# Altium PCB PCB1.PcbDoc (part 3 of 4)
Units mm, origin at the board's own origin, x right, y up, seen from the top; angles counter-clockwise.
Board outline 49 x 49 mm, 8 copper layers (L1(SIG), L2(GND), L3(SIG), L4(GND), L5(PWR), L6(PWR), L7(GND), L8(SIG)), stack 1.6 mm thick; 175 components, 123 nets, 646 pads, 355 vias.
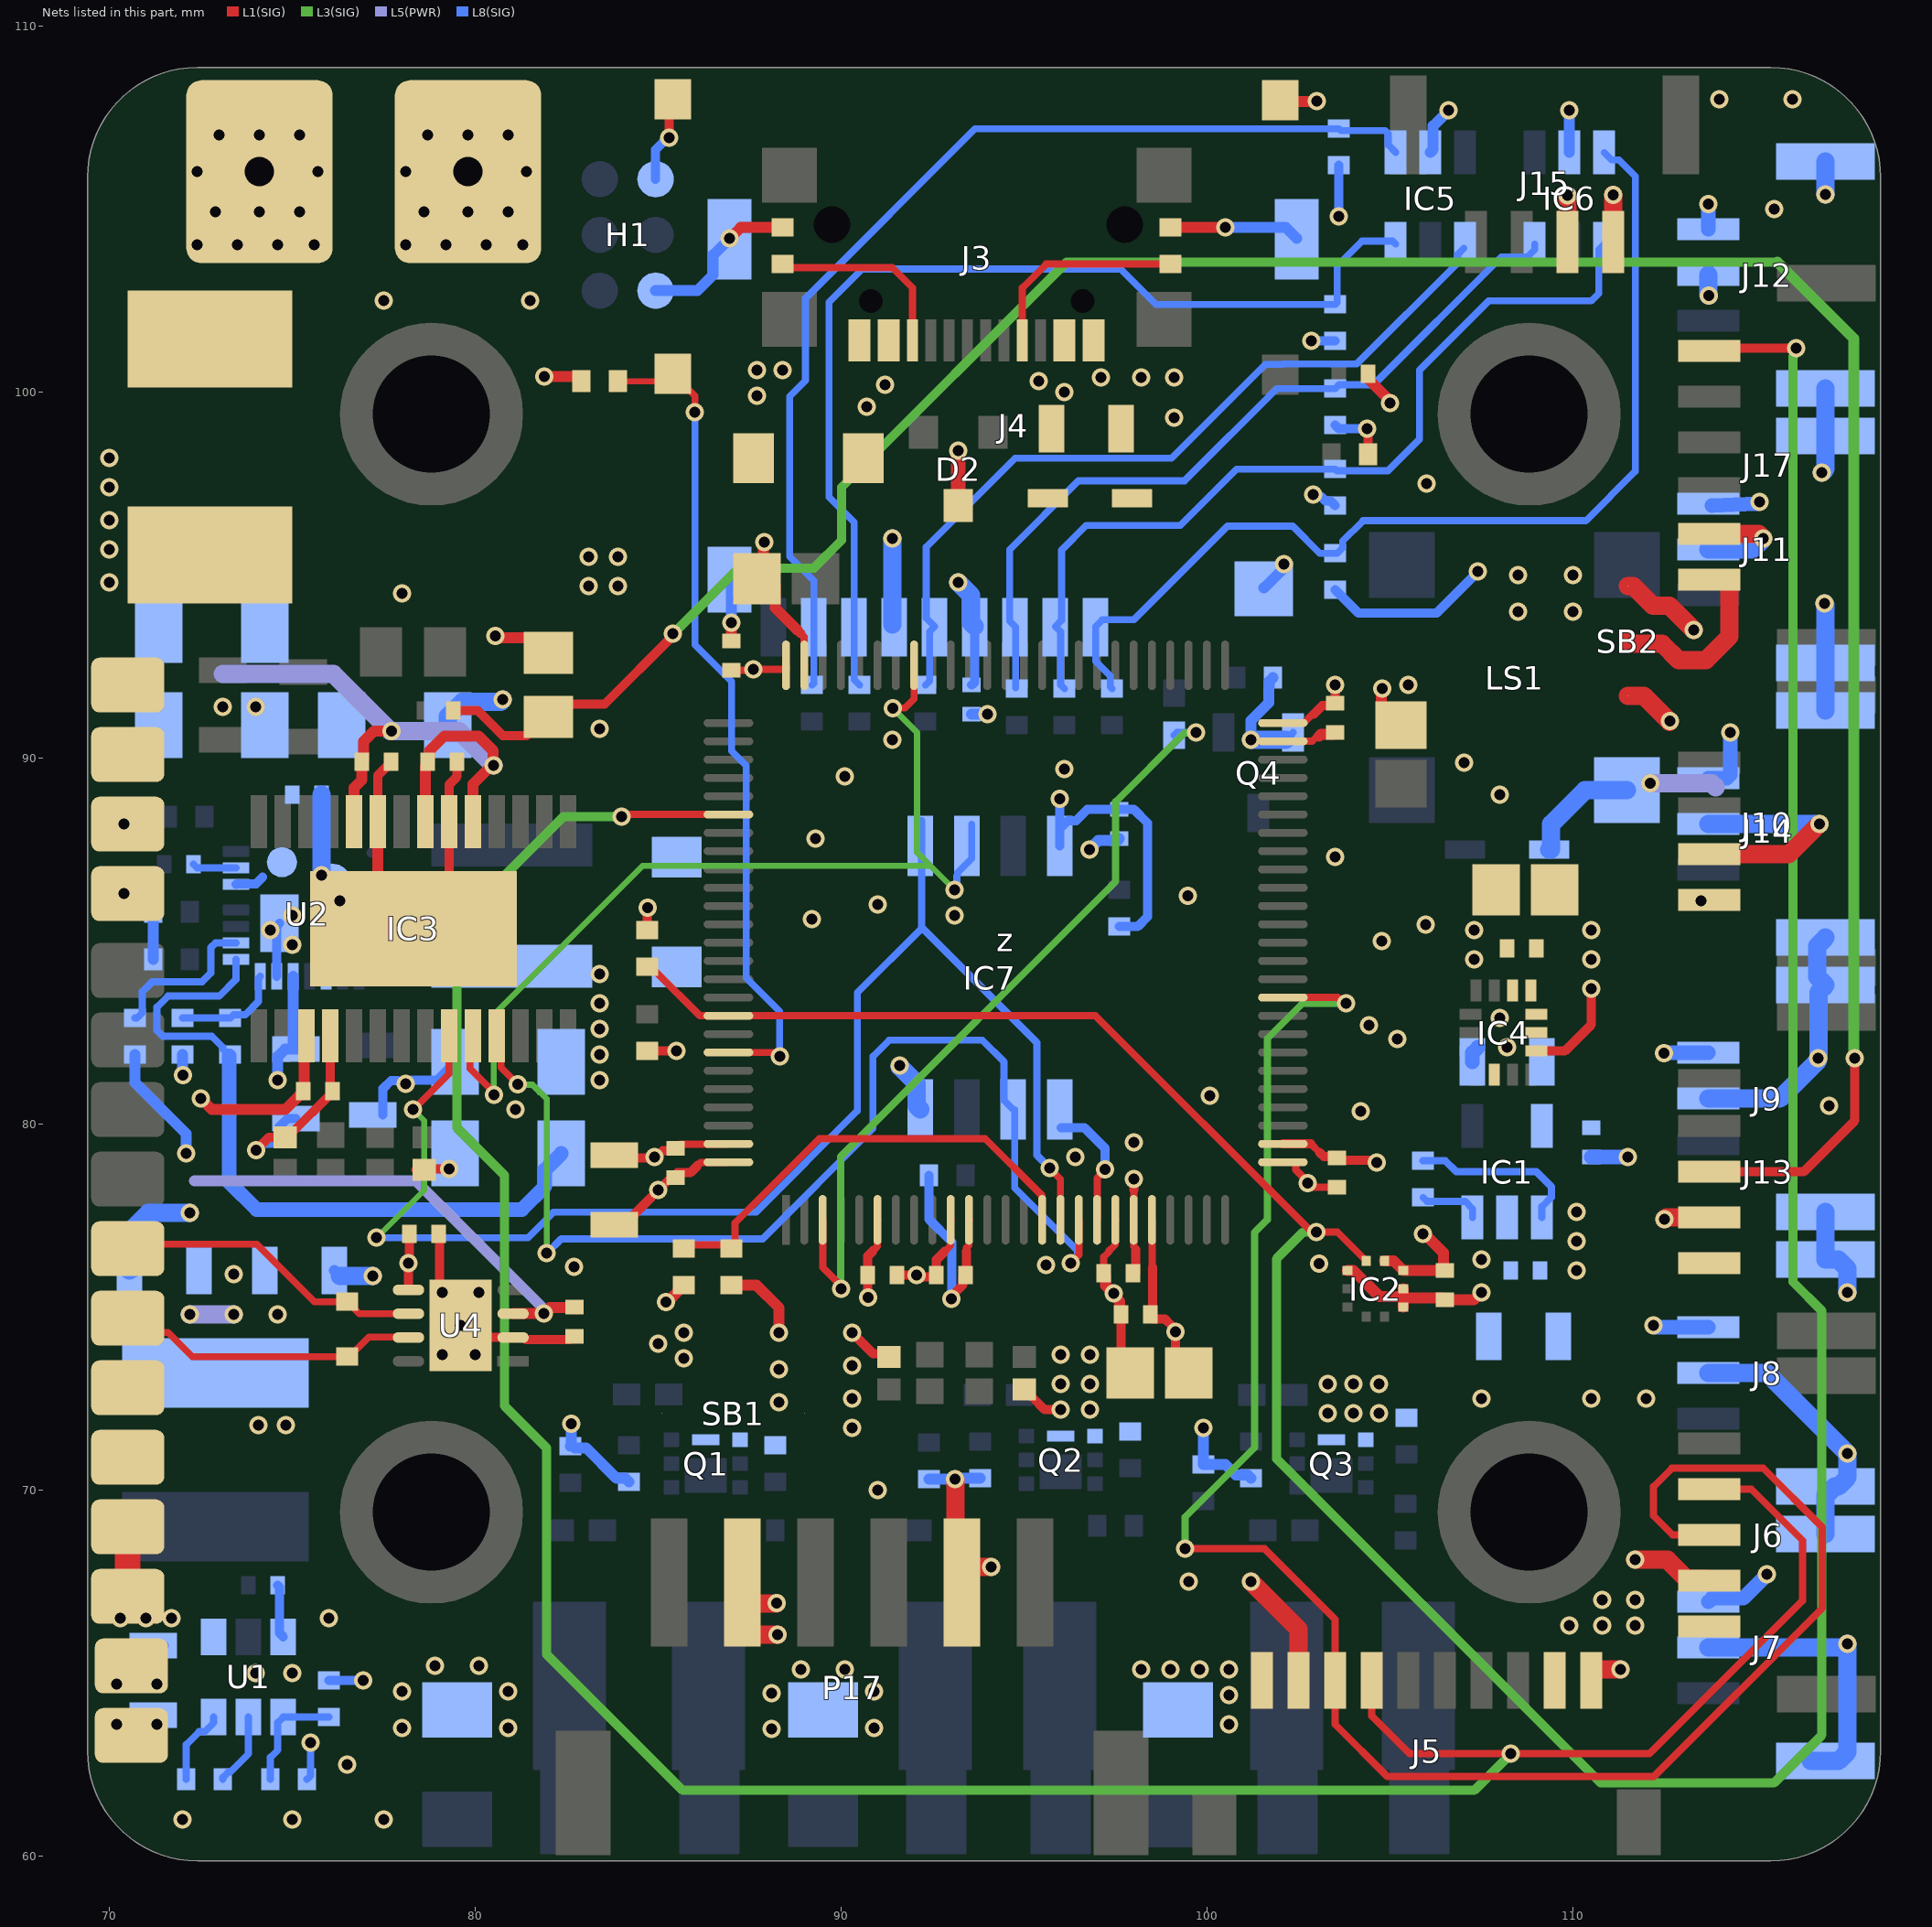
[diagram p8: the nets of this part, all layers, seen from the top]

## Via types
v1: diameter 0.5, hole 0.3, L1(SIG) to L8(SIG), tented both sides, 353 vias
v2: diameter 0.5, hole 0.3, L1(SIG) to L8(SIG), 2 vias

## Nets (pads, with @x,y where several pads share a name; then routed paths per layer and width w, separated by ;. In a path a pad name is that pad's centre, name@x,y a point inside that pad or via, vN(x,y) a via of type N, cw(c..) or ccw(c..) an arc to the next point about the centre after c; other vN are vias at no path point) (continued)
FLASH_CS: (continued)
  L1(SIG) w0.2: z.18@96.99,77.389 96.99,78.528 97.211,78.749 v1(97.211,78.763)
  L8(SIG) w0.25: IC7.1@96.005,79.9 96.649,79.9 97.211,79.338 v1(97.211,78.763)
GND: C1.1 C2.1 C3.1 C4.1 C5.1 C6.1 C7.1 C8.1 C9.1 C10.1 C11.1 C12.1 C13.1 C14.1 C16.1 C17.1 C18.1 C19.1 C20.1 C21.1 C23.1 C24.1 C25.1 C26.2 C27.1 C28.1 C29.1 C30.1 C31.1 C32.1 C33.1 C34.1 C35.1 C36.1 C40.1 C41.1 C42.2 C43.1 C44.1 C45.2 C46.2 C47.2 C48.1 C49.2 D1.2 D2.3 H1.3 IC1.2 IC2.3 IC2.8 IC2.9 IC3.4 IC3.20 IC3.23 IC3.29 IC4.2 IC4.6 IC4.7 IC4.9 IC5.5 IC6.5 IC7.4 J2.1 J3.A1 J3.B1 J4.6 J4.9 J4.10 J4.11 J4.12 J5.2 J5.10 J6.2 J7.2 J7.4 J7.5 J8.2 J8.4 J8.5 J9.2 J9.4 J9.5 J10.2 J10.4 J10.5 J11.2 J11.4 J11.5 J12.2 J12.4 J12.5 J13.2 J14.2 J15.2 J17.2 P1.1 P7.1 P13.1 P15.1 P17.2 P17.5 Q1.4 Q1.8 Q2.4 Q2.8 Q3.4 Q3.8 Q4.2 R4.2 R8.2 R12.1 R13.2 R14.1 R15.1 R16.1 R17.1 R18.1 R20.1 R21.1 R29.1 R37.1 R38.1 R39.1 R41.1 R42.1 R43.1 R45.1 S2.2 U1.4 U2.3-4-27 U2.13 U2.16 U2.25 U4.2 U4.9 z.10 z.19 z.26 z.49 z.74 z.99 | length 162.7
  L1(SIG) w0.2: C12.1@85.606,79.462 86.912,79.462 z.99@86.915,79.464 ; 88.9,93.4 88.988,93.312 88.988,92.542 z.74@88.99,92.539 ; 92.825,76.525 92.988,76.688 92.988,77.386 z.10@92.99,77.389 ; C14.1@97.175,75.925 97.175,76.375 97.325,76.525 97.325,76.55 97.488,76.713 97.488,77.386 z.19@97.49,77.389 ; v1@101.225,90.475 101.236,90.464 z.49@102.065,90.464 102.864,90.464 103,90.6 103.061,90.6 ; z.26@102.065,78.964 102.416,78.964 102.422,78.958 102.422,78.753 102.9,78.275 C7.1@103.55,78.275
  L1(SIG) w0.25: v1(74.003,79.29) 74.362,79.649 C46.2@74.8,79.649 ; C46.2@74.8,79.64 74.975,79.815 75.036,79.815 75.996,80.775 76.025,80.775 76.1,80.85 C35.1@76.1,80.879 ; IC3.4@76.026,82.421 76.026,80.974 C35.1@76.1,80.9 ; IC3.23@77.326,88.271 77.326,89.526 77.575,89.775 77.625,89.775 77.7,89.85 C40.1@77.7,89.9 ; IC3.29@78.301,85.346 79.276,86.321 IC3.20@79.276,88.271 79.276,89.276 79.5,89.5 C41.1@79.5,89.9 ; C47.2@78.373,78.757 78.597,78.757 C47.2@78.6,78.76 ; C47.2@78.74,78.6 78.74,78.719 78.795,78.774 v1(79.28,78.774) ; C45.2@79,77 79.017,76.983 79.017,75.483 v1(79.1,75.4) ; v1(79.6,74.5) 79.925,74.175 81.321,74.175 81.377,74.12 82.575,74.12 82.655,74.199 C42.2@82.705,74.199 ; C19.1@83.8,79.15 83.864,79.086 v1@84.886,79.086 ; v1(84.9,79.1) 84.946,79.1 85.124,79.279 85.4,79.279 C12.1@85.469,79.348 ; 88.8,93.5 88.9,93.4 ; v1(90.3,74.3) 90.865,73.735 91.205,73.735 C32.1@91.3,73.64 ; C1.1@91.525,75.875 91.531,75.881 v1(92.062,75.881) 92.109,75.835 92.56,75.835 C3.1@92.6,75.875 92.6,76.3 92.825,76.525 ; C33.1@95,72.76 95.02,72.76 95.195,72.585 95.195,72.565 95.56,72.2 v1(96,72.2) ; C28.1@97.65,73.75 C13.1@97.65,74.8
  L1(SIG) w0.3: IC3.23@77.326,88.271 77.326,86.321 IC3.29@78.301,85.346 ; v1(80.543,93.345) 80.597,93.345 80.643,93.299 81.576,93.299 R29.1@82,92.875 ; v1(81.878,100.432) 82.8,100.432 82.9,100.332 R4.2@82.9,100.3 ; v1(85.205,75.144) 85.244,75.144 85.55,75.45 85.55,75.5 85.65,75.6 R21.1@85.7,75.6 ; v1(86.95,104.2) 87.25,104.5 R16.1@88.4,104.5 ; C9.1@87,93.2 v1(87,93.7) ; C27.1@87.2,94.35 87.7,94.85 C27.1@87.7,94.9 87.866,95.066 87.866,95.866 v1(87.9,95.9) ; C27.1@88,94.9 88.199,94.701 88.199,94.101 88.8,93.5 ; C14.1@97.175,75.925 97.225,75.875 97.225,75.589 97.439,75.375 v1(97.45,75.375) 97.45,75.323 97.612,75.161 97.612,74.838 C13.1@97.65,74.8 ; R15.1@99,104.5 v1(100.5,104.5) ; S2.2@102,108 102.061,107.939 v1@102.989,107.939 ; 103.061,90.6 103.111,90.65 103.45,90.65 C11.1@103.5,90.7 ; IC2.3@103.838,76 104,76 104.709,75.291 105.321,75.291 105.362,75.25 ; C31.1@104.4,100.5 104.45,100.45 104.45,100.314 104.962,99.802 104.962,99.738 v1(105,99.7) ; v1(104.784,91.906) 104.762,91.884 104.762,91.4 105.262,90.9 C26.2@105.3,90.9 ; IC2.8@105.362,75 105.362,75.25 ; IC2.9@105.362,75.5 105.362,75.25 ; v1(107.5,75.4) 107.486,75.4 107.286,75.2 C36.1@106.5,75.2 106.45,75.25 105.362,75.25
  L1(SIG) w0.4: D2.3@93.2,96.9 v1(93.2,98.4)
  L1(SIG) w0.5: P17.2@87.3,67.475 P17.2@87.3,67.15 ; v1(88.228,66.914) 88.216,66.902 87.548,66.902 P17.2@87.3,67.15 ; v1(88.257,66.061) 87.55,66.061 87.3,66.311 P17.2@87.3,67.15 ; v1@93.114,70.29 93.114,67.661 P17.5@93.3,67.475 93.55,67.725 93.55,67.9 v1(94.1,67.9) ; v1(101.2,67.5) 102.5,66.2 J5.2@102.5,64.8 ; v1(109.843,105.383) 109.85,105.376 J15.2@109.85,104.1 ; J5.10@110.5,64.8 110.5,65.05 110.55,65.1 v1(111.3,65.1) ; v1(111.7,68.1) 112.578,68.1 113.103,67.575 113.675,67.575 J6.2@113.725,67.525 ; v1(112.5,77.4) 112.55,77.45 J13.2@113.725,77.45 ; J14.2@113.725,87.375 115.895,87.375 v1(116.728,88.208) ; J17.2@113.725,96.125 115.075,96.125 v1(115.2,96)
  L1(SIG) w0.7: P15.1@70.5,67.1 P7.1@70.5,69
  L8(SIG) w0.2: Q4.2@102.15,90.5 Q4.2@102.35,90.7
  L8(SIG) w0.25: C4.1@71.2,65.75 C4.1@71.5,65.75 ; v1(74.003,79.29) 74.038,79.29 74.227,79.479 74.429,79.479 74.635,79.685 74.635,79.925 74.86,80.15 C48.1@75.1,80.15 ; U2.16@74.572,84.038 74.572,85.412 U2.25@74.648,85.487 ; 75.775,84.925 75.874,84.826 75.874,84.663 75.898,84.639 75.898,84.062 U2.13@75.923,84.037 ; R8.2@76,64.8 v1(76.929,64.8) ; C16.1@77.475,80.25 77.475,80.975 77.691,81.191 77.876,81.191 77.919,81.148 78.052,81.148 v1(78.1,81.1) 78.168,81.1 78.268,81.2 78.95,81.2 C18.1@79.45,81.7
  L8(SIG) w0.3: v1(70.4,86.3) 70.9,86.3 71.1,86.1 71.1,85.9 R12.1@71.2,85.8 ; R14.1@71.2,84.5 R12.1@71.2,85.849 ; R13.2@72,81.9 72,81.35 v1(72.012,81.338) ; C5.1@76.15,76 C5.1@76.3,75.85 ; R17.1@82.6,71.2 82.625,71.225 v1(82.625,71.823) ; R17.1@82.718,71.157 83.025,71.157 83.857,70.325 84.1,70.325 R37.1@84.2,70.225 ; H1.3@84.924,102.776 86.067,102.776 86.5,103.209 86.5,103.75 v1(86.95,104.2) ; J4.10@86.95,94.875 86.991,94.834 86.991,93.709 v1(87,93.7) ; J4.6@91.4,93.65 J4.6@91.45,93.6 ; R18.1@92.4,70.3 v1(93.104,70.3) 93.129,70.325 R38.1@93.8,70.325 ; C44.1@93.56,91.205 93.563,91.208 93.996,91.208 v1(93.999,91.211) ; v1(96.779,87.51) 97.02,87.75 97.55,87.75 C49.2@97.6,87.8 ; v1(99.9,71.7) R20.1@99.9,70.7 100.5,70.7 100.788,70.412 101.113,70.412 R39.1@101.2,70.325 ; v1(100.5,104.5) 102.15,104.5 J4.11@102.45,104.2 ; v1(101.2,90.5) 101.2,91.035 101.678,91.513 101.678,91.936 101.7,91.958 101.7,92.1 R42.1@101.8,92.2 ; J4.9@101.55,94.65 102.1,95.2 v1(102.1,95.3) ; IC5.5@106.1,106.55 106.175,106.625 106.175,107.275 v1(106.6,107.7) ; IC6.5@109.9,106.55 v1(109.9,107.7)
  L8(SIG) w0.4: C8.1@107.25,81.7 107.25,81.95 C8.1@107.4,82.1 ; C21.1@110.5,79.1 v1(111.5,79.1)
  L8(SIG) w0.5: C6.1@70.55,76 70.6,76.05 70.6,77.113 71.062,77.575 v1(72.2,77.575) ; v1(75.8,86.8) C29.1@75.8,89 ; C5.1@76.3,75.85 v1(77.2,75.85) ; C24.1@79.25,90.9 79.25,91.141 79.65,91.541 80.691,91.541 v1(80.75,91.6) ; J4.6@91.4,93.65 v1(91.4,96) ; v1@91.6,81.572 92.06,81.112 92.06,80.5 IC7.4@92.16,80.4 ; v1(101.2,90.5) Q4.2@102.15,90.5 ; J7.2@113.7,65.7 117.4,65.7 v1(117.5,65.8) 117.5,62.85 117.25,62.6 J7.5@116.5,62.6 ; J8.2@113.7,73.2 115.3,73.2 v1(117.5,71) 117.5,70.35 117.25,70.1 117.15,70.1 116.9,69.85 J7.4@116.9,68.8 ; J9.2@113.7,80.7 115.649,80.7 116.7,81.751 v1(116.7,81.8) ; J10.2@113.7,88.2 116.72,88.2 v1(116.728,88.208) ; J11.2@113.7,95.7 114.9,95.7 v1(115.2,96) ; J12.2@113.7,103.2 113.7,103.15 113.7,102.655 v1(113.706,102.649) ; v1@116.704,81.804 116.704,83.604 J9.4@116.9,83.8 116.665,84.035 116.665,84.865 J10.5@116.9,85.1 ; v1(116.8,97.8) 116.9,97.9 J12.5@116.9,100.1 ; v1(116.863,94.225) 116.9,94.188 J11.5@116.9,92.6 J10.4@116.9,91.3 ; J9.5@116.9,77.6 J8.4@116.9,76.3 117.25,76.3 117.5,76.05 v1(117.5,75.4) ; v1(116.9,105.4) J12.4@116.9,106.3
  other v1: 72,61 75,61 77.5,61 76.5,62.5 74,65 75,65 70.3,66.5 71,66.5 71.7,66.5 76,66.5 99.5,67.5 91,70 90.3,71.7 103.3,72.1 104,72.1 104.7,72.1 96.8,72.2 90.3,72.5 107.5,72.5 110.5,72.5 112,72.5 96,72.9 96.8,72.9 103.3,72.9 104,72.9 104.7,72.9 90.3,73.4 79.1,73.7 80,73.7 96,73.7 96.8,73.7 80.1,75.4 82.7,76.1 95.6,76.15 107.5,76.3 102.741,78.395 96.4,79.1 98,79.5 104.2,80.35 81.1,80.4 117,80.5 100.075,80.775 91.6,81.6 108.2,82.1 105.2,82.325 104.425,82.7 108,82.9 107.3,84.5 75,84.9 104.775,85 74.4,85.3 107.3,85.3 105.975,85.45 89.2,85.6 75,85.7 93.1,85.7 91,86 76.3,86.1 99.474,86.244 89.3,87.8 70.4,88.2 108,89 90.1,89.5 96.1,89.7 107.025,89.875 91.4,90.5 83.4,90.8 105.5,92 108.5,94 110,94 78,94.5 70,94.8 108.5,95 110,95 70,95.7 70,96.5 70,97.4 106,97.5 70,98.2 99.1,99.3 87.7,99.9 97.1,100.4 98.2,100.4 99.1,100.4 87.7,100.6 88.4,100.6 77.5,102.5 81.5,102.5 78.1,104.025 79.2,104.025 80.3,104.025 81.3,104.025 78.6,104.925 79.8,104.925 80.9,104.925 115.5,105 78.1,106.025 81.4,106.025 78.7,107.025 79.8,107.025 80.9,107.025 103,107.95 114,108 116,108
  other v2: 103.063,76.199 103.5,87.3
GPS_VIN: J17.1 SB2.2 | length 5.3
  L1(SIG) w0.5: SB2.2@111.5,93.2 111.568,93.132 112.43,93.132 112.878,92.684 113.631,92.684 114.275,93.328 114.275,94.825 114.225,94.875 J17.1@113.725,94.875
I2C_SCL: IC2.2 J17.6 R2.1 z.92 | length 89.4
  L1(SIG) w0.2: R2.1@84.926,84.171 86.13,82.966 86.912,82.966 z.92@86.915,82.964 96.946,82.964 102.792,77.118 102.93,77.118 v1(102.988,77.061) 103.552,77.061 104.312,76.301 104.325,76.301 104.35,76.275 IC2.2@104.35,76.263
  L1(SIG) w0.25: J17.6@113.725,101.125 113.8,101.2 v1(116.1,101.2)
  L3(SIG) w0.25: v1(102.988,77.061) 102.628,77.061 101.89,76.323 101.89,72.71 101.9,72.7 101.9,70.854 110.754,62 115.488,62 116.8,63.312 116.8,74.9 116.009,75.691 116.009,100.976 116.052,101.019 116.052,101.152 v1(116.1,101.2)